# EAGLE board SchemaElectrica (EAGLE 7.6.0)

Size 73.58 x 393.59 mm. Coordinates in mm from the lower left corner, seen from the top.
Outline: 0,0 56.82,0 56.82,53.33 0,53.33 0,0
Copper layers (1*16): Top 0.035mm / dielectric 1.5mm / Bottom 0.035mm
Design rules "default": minimum track width 10mil, minimum drill 24mil, track to track 8mil, track to pad 8mil, pad to pad 8mil, via to via 8mil, smd to smd 8mil, copper to edge 40mil, drill to drill 8mil, minimum pad ring 10mil, minimum via ring 8mil, stop-mask expansion 4mil, vias tented up to drill 0mil, thermal gap 10mil

## Footprints (pad centres in the part's own frame; a part is rotated, then mirrored left to right if it is on the bottom)
LED-RGB-THRU = drill 0.762 pad 0.889 long: 1 1.905,0; 2 0.635,0; 3 -0.635,0; 4 -1.905,0
0207/10 = drill 0.813 octagon: 1 -5.08,0; 2 5.08,0
TL1105 = drill 1 pad 1.676: 1 -2.25,3.25; 2 2.25,3.25; 3 -2.25,-3.25; 4 2.25,-3.25
DIL16 = drill 0.813 long: 1 -8.89,-3.81; 2 -6.35,-3.81; 3 -3.81,-3.81; 4 -1.27,-3.81; 5 1.27,-3.81; 6 3.81,-3.81; 7 6.35,-3.81; 8 8.89,-3.81; 9 8.89,3.81; 10 6.35,3.81; 11 3.81,3.81; 12 1.27,3.81; 13 -1.27,3.81; 14 -3.81,3.81; 15 -6.35,3.81; 16 -8.89,3.81
ARDUINO_UNO = drill 1.016 pad 1.88: 0 63.5,50.8; 1 60.96,50.8; 2 58.42,50.8; 3 55.88,50.8; 3.3V 35.56,2.54; 4 53.34,50.8; 5 50.8,50.8; 5V 38.1,2.54; 6 48.26,50.8; 7 45.72,50.8; 8 41.656,50.8; 9 39.116,50.8; 10 36.576,50.8; 11 34.036,50.8; 12 31.496,50.8; 13 28.956,50.8; A0 50.8,2.54; A1 53.34,2.54; A2 55.88,2.54; A3 58.42,2.54; A4 60.96,2.54; A5 63.5,2.54; AREF 23.876,50.8; GND 26.416,50.8; GND. 43.18,2.54; GND.. 40.64,2.54; I/OREF 30.48,2.54; N/C 27.94,2.54; RESET 33.02,2.54; SCL 18.796,50.8; SDA 21.336,50.8; VIN 45.72,2.54 | hole 3.2: 66.04,7.62; 66.04,35.56; 15.24,50.8; 13.97,2.54

## Placement (x,y rotation side)
D1  [LED-RGB-THRU]  5,60.88 0 top
D2  [LED-RGB-THRU]  5,73.58 0 top
D3  [LED-RGB-THRU]  5,86.28 0 top
D4  [LED-RGB-THRU]  5,98.98 0 top
D5  [LED-RGB-THRU]  5,111.68 0 top
D6  [LED-RGB-THRU]  5,124.38 0 top
D7  [LED-RGB-THRU]  5,137.08 0 top
D8  [LED-RGB-THRU]  5,149.78 0 top
D9  [LED-RGB-THRU]  5,162.48 0 top
R1  330k‎Ω  [0207/10]  5,352.98 0 top
R2  330k‎Ω  [0207/10]  5,365.68 0 top
R3  330k‎Ω  [0207/10]  5,378.38 0 top
R4  330k‎Ω  [0207/10]  5,391.08 0 top
R5  330k‎Ω  [0207/10]  5,403.78 0 top  (outside the outline)
R6  330k‎Ω  [0207/10]  5,416.48 0 top  (outside the outline)
R7  330k‎Ω  [0207/10]  5,429.18 0 top  (outside the outline)
R8  330k‎Ω  [0207/10]  5,441.88 0 top  (outside the outline)
R9  330k‎Ω  [0207/10]  5,454.58 0 top  (outside the outline)
R10  330k‎Ω  [0207/10]  5,619.68 0 top  (outside the outline)
R11  330k‎Ω  [0207/10]  5,632.38 0 top  (outside the outline)
R12  330k‎Ω  [0207/10]  5,645.08 0 top  (outside the outline)
R13  330k‎Ω  [0207/10]  5,467.28 0 top  (outside the outline)
R14  330k‎Ω  [0207/10]  5,479.98 0 top  (outside the outline)
R15  330k‎Ω  [0207/10]  5,492.68 0 top  (outside the outline)
R16  330k‎Ω  [0207/10]  5,505.38 0 top  (outside the outline)
R17  330k‎Ω  [0207/10]  5,518.08 0 top  (outside the outline)
R18  330k‎Ω  [0207/10]  5,530.78 0 top  (outside the outline)
R19  330k‎Ω  [0207/10]  5,543.48 0 top  (outside the outline)
R20  330k‎Ω  [0207/10]  5,556.18 0 top  (outside the outline)
R21  330k‎Ω  [0207/10]  5,568.88 0 top  (outside the outline)
R22  330k‎Ω  [0207/10]  5,581.58 0 top  (outside the outline)
R23  330k‎Ω  [0207/10]  5,594.28 0 top  (outside the outline)
R24  330k‎Ω  [0207/10]  5,606.98 0 top  (outside the outline)
R25  330k‎Ω  [0207/10]  5,657.78 0 top  (outside the outline)
R26  330k‎Ω  [0207/10]  5,670.48 0 top  (outside the outline)
R27  330k‎Ω  [0207/10]  5,683.18 0 top  (outside the outline)
S1  [TL1105]  5,10.08 0 top
S2  [TL1105]  5,22.78 0 top
S3  [TL1105]  5,289.48 0 top
S4  [TL1105]  5,35.48 0 top
S5  [TL1105]  5,48.18 0 top
S6  [TL1105]  5,302.18 0 top
S7  [TL1105]  5,314.88 0 top
S8  [TL1105]  5,327.58 0 top
U1  [DIL16]  5,175.18 0 top
U2  [DIL16]  5,187.88 0 top
U3  [DIL16]  5,200.58 0 top
U4  [DIL16]  5,213.28 0 top
U5  [DIL16]  5,225.98 0 top
U6  [DIL16]  5,238.68 0 top
U7  [DIL16]  5,251.38 0 top
U8  [DIL16]  5,264.08 0 top
U9  [DIL16]  5,276.78 0 top
U10  [ARDUINO_UNO]  5,340.28 0 top

## Library data of the parts
D1-D9 R1-R27 S1-S8 U1-U10 = AUTODESK_CIRCUITS_BREADBOARD

## Nets
N$1: S1.4 S2.2 U1.10 U1.16 U2.10 U2.16 U3.10 U3.16 U4.10 U4.16 U5.10 U5.16 U6.10 U6.16 U7.10 U7.16 U8.10 U8.16 U9.10 U9.16 U10.5V
N$2: U1.12 U2.12 U3.12 U4.12 U5.12 U6.12 U7.12 U8.12 U9.12 U10.3
N$4: U3.14 U8.9 U10.2
N$6: U4.9 U6.14
N$7: U6.9 U8.14
N$8: U4.14 U5.9
N$9: U5.14 U7.9
N$10: R3.2 U4.5
N$11: R1.2 U4.6
N$12: R2.2 U4.7
N$13: D1.1 R2.1
N$14: D1.3 R1.1
N$15: D1.4 R3.1
N$16: D1.2 D2.2 D3.2 D4.2 D5.2 D6.2 D7.2 D8.2 D9.2 S1.1 S1.3 S2.1 S4.3 U1.8 U1.13 U2.8 U2.13 U3.8 U3.13 U4.8 U4.13 U5.13 U6.8 U6.13 U7.8 U7.13 U8.8 U8.13 U9.8 U9.13 U10.GND..
N$17: S4.1 S5.2
N$18: S6.3 S8.4
N$19: S3.4 S7.2
N$20: U1.9 U2.14
N$21: U1.14 U3.9
N$22: U2.9 U7.14 U9.14
N$23: S1.2 U10.5
N$24: S2.4 U10.6
N$25: S4.2 U10.7
N$26: S5.3 U10.8
N$27: S3.1 U10.9
N$28: S7.3 U10.10
N$29: S8.1 U10.11
N$30: S6.2 U10.12
N$31: U10.13
N$32: U1.11 U2.11 U3.11 U4.11 U5.11 U6.11 U7.11 U8.11 U9.11 U10.4
N$33: D2.4 R5.2
N$34: R5.1 U6.5
N$35: D2.3 R4.2
N$36: D2.1 R6.2
N$37: R4.1 U6.6
N$38: R6.1 U6.7
N$39: D3.4 R9.2
N$40: D3.3 R8.2
N$41: D3.1 R7.2
N$42: R9.1 U8.5
N$43: R8.1 U8.6
N$44: R7.1 U8.7
N$45: D4.1 R12.1
N$46: D4.3 R10.1
N$47: D4.4 R11.1
N$48: D8.1 R20.1
N$49: D8.3 R19.1
N$50: D8.4 R21.1
N$51: D9.1 R22.1
N$52: D9.3 R23.1
N$53: D9.4 R24.1
N$54: R11.2 U5.5
N$55: R10.2 U5.6
N$56: R12.2 U5.7
N$57: R21.2 U7.5
N$58: R19.2 U7.6
N$59: R20.2 U7.7
N$60: R22.2 U9.7
N$61: R23.2 U9.6
N$62: R24.2 U9.5
N$63: D7.1 R15.1
N$64: D7.3 R14.1
N$65: D7.4 R13.1
N$66: R15.2 U3.7
N$67: R14.2 U3.6
N$68: R13.2 U3.5
N$69: D5.4 R16.1
N$70: D5.1 R18.1
N$71: D5.3 R17.1
N$72: R18.2 U1.7
N$73: R17.2 U1.6
N$74: R16.2 U1.5
N$75: D6.1 R27.1
N$76: D6.3 R26.1
N$77: D6.4 R25.1
N$78: R27.2 U2.7
N$79: R26.2 U2.6
N$80: R25.2 U2.5

## Tracks (layer width: path | path; a pad name or v marks a point on that pad's centre or on a via)
N$1  (20 unrouted)
N$2  (9 unrouted)
N$4  (2 unrouted)
N$6  (1 unrouted)
N$7  (1 unrouted)
N$8  (1 unrouted)
N$9  (1 unrouted)
N$10  (1 unrouted)
N$11  (1 unrouted)
N$12  (1 unrouted)
N$13  (1 unrouted)
N$14  (1 unrouted)
N$15  (1 unrouted)
N$16  (30 unrouted)
N$17  (1 unrouted)
N$18  (1 unrouted)
N$19  (1 unrouted)
N$20  (1 unrouted)
N$21  (1 unrouted)
N$22  (2 unrouted)
N$23  (1 unrouted)
N$24  (1 unrouted)
N$25  (1 unrouted)
N$26  (1 unrouted)
N$27  (1 unrouted)
N$28  (1 unrouted)
N$29  (1 unrouted)
N$30  (1 unrouted)
N$32  (9 unrouted)
N$33  (1 unrouted)
N$34  (1 unrouted)
N$35  (1 unrouted)
N$36  (1 unrouted)
N$37  (1 unrouted)
N$38  (1 unrouted)
N$39  (1 unrouted)
N$40  (1 unrouted)
N$41  (1 unrouted)
N$42  (1 unrouted)
N$43  (1 unrouted)
N$44  (1 unrouted)
N$45  (1 unrouted)
N$46  (1 unrouted)
N$47  (1 unrouted)
N$48  (1 unrouted)
N$49  (1 unrouted)
N$50  (1 unrouted)
N$51  (1 unrouted)
N$52  (1 unrouted)
N$53  (1 unrouted)
N$54  (1 unrouted)
N$55  (1 unrouted)
N$56  (1 unrouted)
N$57  (1 unrouted)
N$58  (1 unrouted)
N$59  (1 unrouted)
N$60  (1 unrouted)
N$61  (1 unrouted)
N$62  (1 unrouted)
N$63  (1 unrouted)
N$64  (1 unrouted)
N$65  (1 unrouted)
N$66  (1 unrouted)
N$67  (1 unrouted)
N$68  (1 unrouted)
N$69  (1 unrouted)
N$70  (1 unrouted)
N$71  (1 unrouted)
N$72  (1 unrouted)
N$73  (1 unrouted)
N$74  (1 unrouted)
N$75  (1 unrouted)
N$76  (1 unrouted)
N$77  (1 unrouted)
N$78  (1 unrouted)
N$79  (1 unrouted)
N$80  (1 unrouted)